# EAGLE board pcb (EAGLE 9.7.0)
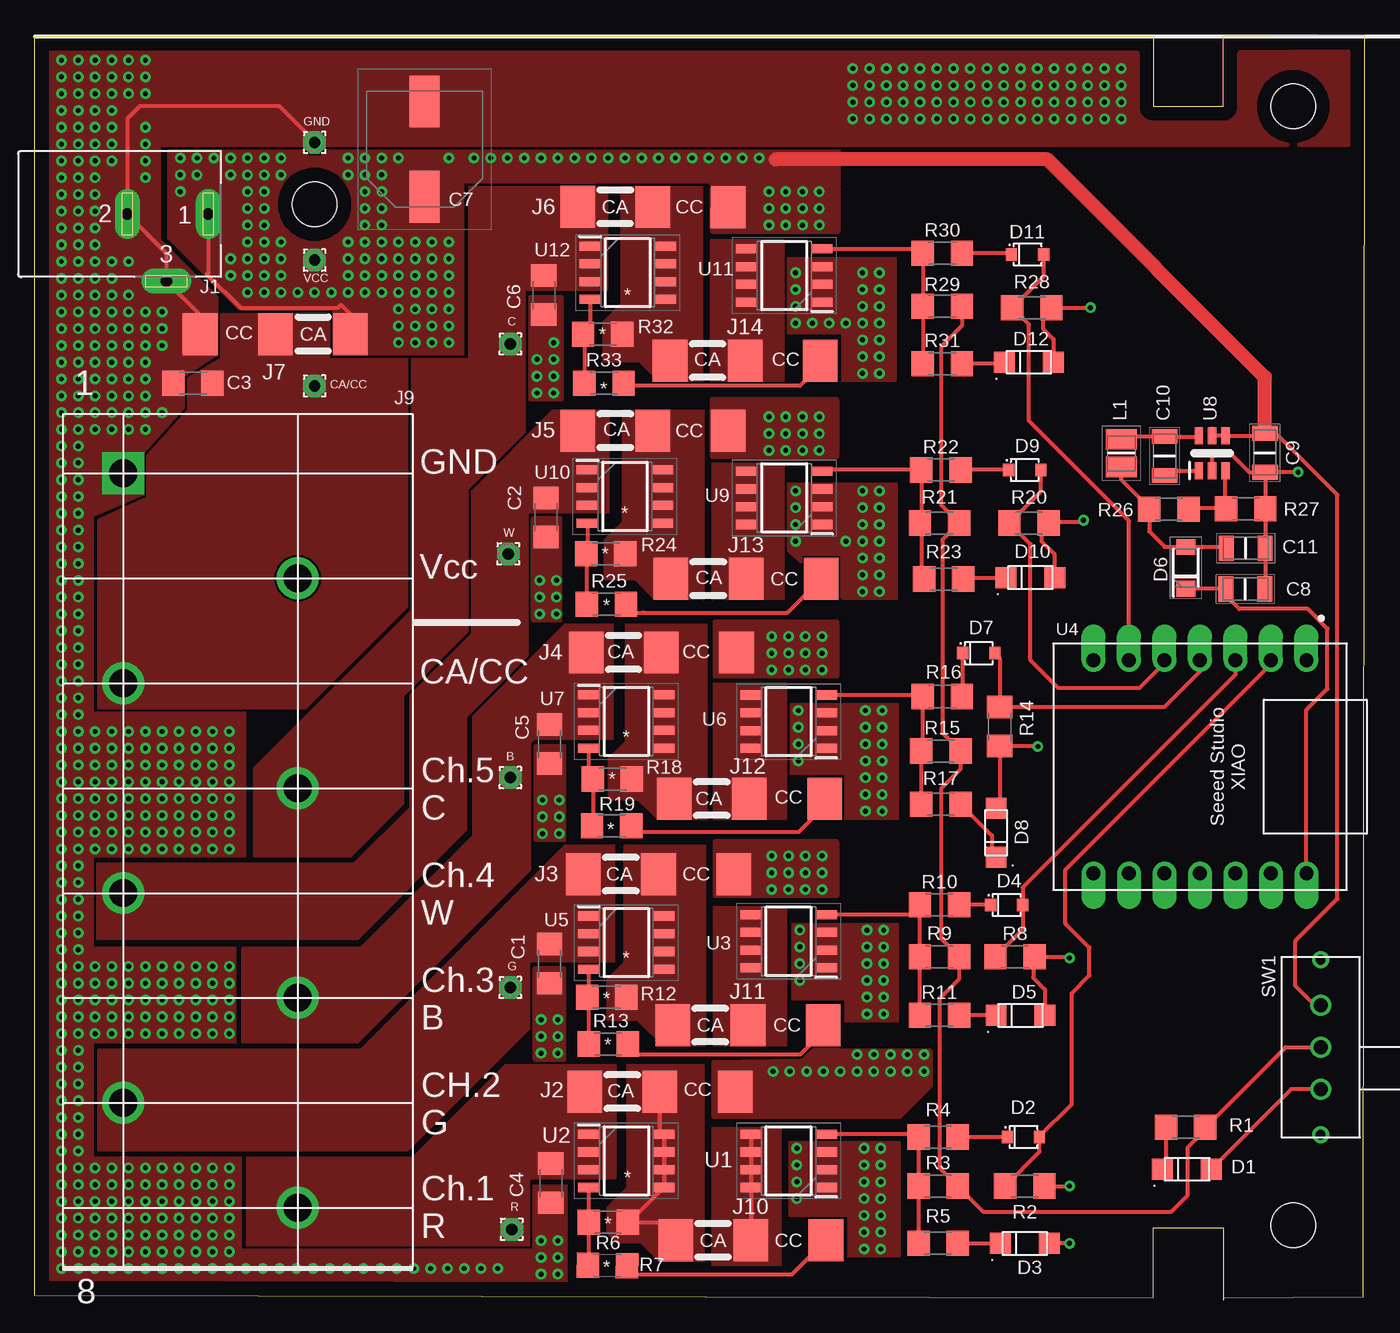
[diagram p0: board, top side]
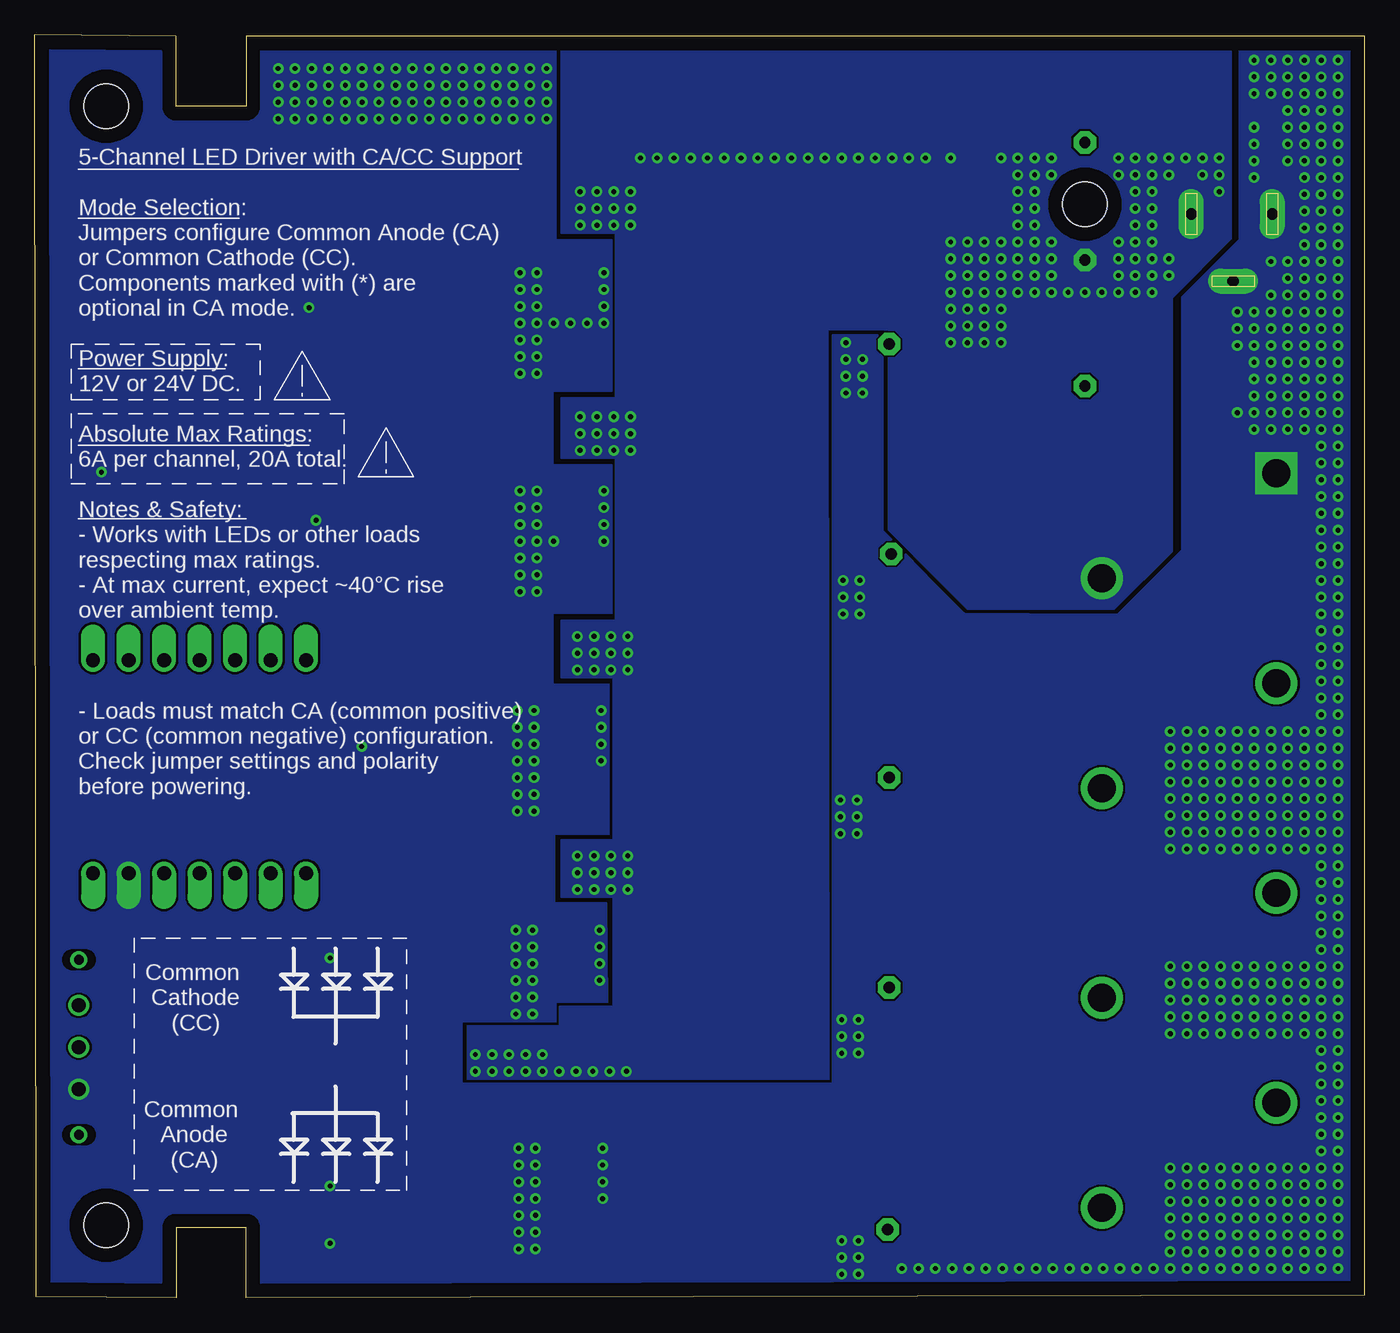
[diagram p1: board, bottom side, seen from below]

Size 95.1 x 90.3 mm. Coordinates in mm from the lower left corner, seen from the top.
Outline: 0,0.2 80,0 80,5 85,5 85,0 95,0.1 95.1,90.3 85,90.2 85,85.2 80,85.2 80,90.2 0,90.2 0,0.2
Copper layers (1*16): Top / Bottom
Stack-up 2 Layer Stack: Top SilkScreen Epoxy Ink / Top SolderMask User Defined 0.0254mm Dk 4.3 / Top Surface Finish Lead-Free 0.02mm / Top User Defined 0.22mm / Dielectric-1 Core:084 1.067mm / Bottom User Defined 0.22mm / Bottom Surface Finish Lead-Free 0.02mm / Bottom SolderMask User Defined 0.0254mm Dk 4.3 / Bottom SilkScreen Epoxy Ink
Design rules: minimum drill size 0.3mm, minimum copper width 4mil, keepout clearance 0mil, drill distance 6mil, via restrict clearance 0mil, dimension clearance 40mil, restrict clearance 0mil, copper clearance wire_polygon to wire_polygon 6mil, copper clearance wire_polygon to pad_smd 6mil, copper clearance wire_polygon to via 12mil, copper clearance pad_smd to pad_smd 1mm, copper clearance pad_smd to via 0.75mm, copper clearance via to via 12mil, copper clearance smd to pad (same net) 6mil, copper clearance smd to via (same net) 6mil, copper clearance smd to smd (same net) 6mil
Holes 3.2 mm at 90,5.2 90,85.2 20,78.2

## Footprints (pad centres in the part's own frame; a part is rotated, then mirrored left to right if it is on the bottom)
1206 = smd 1.6 x 1.8: 1 -1.4,0; 2 1.4,0
CAPAE830X1050N = smd 3.7 x 2.15: 1 -3.4,0; 2 3.4,0
CAPC3216X180N = smd 1.05 x 1.82: 1 -1.39,0; 2 1.39,0
1206-LED = smd 1.5 x 1.5: P$1 -1.75,0; P$2 1.75,0
USC_TOS = smd 0.8 x 0.9: 1 -1.15,0; 2 1.15,0
SODFL3518X115N = smd 1.12 x 1.37: 1 -1.5,0; 2 1.5,0
694106301002 = drill 0.8 pad 1.8 long: 1 13.6,0; 2 7.8,0; 3 10.6,-4.8
5102-2 = smd 2.475 x 3: P$1 0,0; P$2 5.375,0; P$3 -5.375,0
EB171SA-08-M = drill 2 square: P$1 4.25,4.3 | drill 2: P$2 11.75,16.8; P$3 19.25,4.3; P$4 26.75,16.8; P$5 34.25,4.3; P$6 41.75,16.8; P$7 49.25,4.3; P$8 56.75,16.8
INDC2520X100N = smd 1.45 x 2.2: 1 -1,0; 2 1,0
1,6/0,8 = drill 0.813 pad 1.6 octagon: 1 0,0
SLW-129956-4A-RA-N-D = drill 1: P$1 -3,0; P$2 0,0; P$3 3,0 | drill 0.7 slot 1.6 rotated 90: P$4 -6.25,0; P$5 6.25,0
SOIC127P600X175-8N = smd 1.5 x 0.65: 1 -2.7,1.905; 2 -2.7,0.635; 3 -2.7,-0.635; 4 -2.7,-1.905; 5 2.7,-1.905; 6 2.7,-0.635; 7 2.7,0.635; 8 2.7,1.905
SOIC127P600X170-8N = smd 1.525 x 0.65: 1 -2.688,1.905; 2 -2.688,0.635; 3 -2.688,-0.635; 4 -2.688,-1.905; 5 2.688,-1.905; 6 2.688,-0.635; 7 2.688,0.635; 8 2.688,1.905
XIAO-GENERIC-HYBRID-MODULE14P-2.54-21X17.8MM = drill 1 pad 1.7 offset: 1 -7.62,7.62; 2 -7.62,5.08; 3 -7.62,2.54; 4 -7.62,0; 5 -7.62,-2.54; 6 -7.62,-5.08; 7 -7.62,-7.62; 8 7.62,-7.62; 9 7.62,-5.08; 10 7.62,-2.54; 11 7.62,0; 12 7.62,2.54; 13 7.62,5.08; 14 7.62,7.62
SOT95P280X145-6N = smd 1.2 x 0.6: 1 -1.25,0.95; 2 -1.25,0; 3 -1.25,-0.95; 4 1.25,-0.95; 5 1.25,0; 6 1.25,0.95

## Placement (x,y rotation side)
C1  22uF  [1206]  36.8,23.9 90 top
C2  22uF  [1206]  36.55,55.8 90 top
C3  22uF  [1206]  11.3,65.4 0 top
C4  22uF  [1206]  36.9,8.2 90 top
C5  22uF  [1206]  36.8,39.6 90 top
C6  22uF  [1206]  36.4,71.7 90 top
C7  [CAPAE830X1050N]  27.86,82.13 90 top
C8  47uF  [CAPC3216X180N]  86.57,50.68 180 top
C9  2.2uF  [CAPC3216X180N]  87.97,60.43 90 top
C10  0.1uF  [CAPC3216X180N]  80.8,60.2 90 top
C11  22uF  [CAPC3216X180N]  86.6,53.6 180 top
D1  HT-150  [1206-LED]  82.4,9.2 0 top
D2  [USC_TOS]  70.7,11.5 0 top
D3  HT-150  [1206-LED]  70.8,3.9 0 top
D4  [USC_TOS]  69.5,28.1 0 top
D5  HT-150  [1206-LED]  70.5,20.2 0 top
D6  [SODFL3518X115N]  82.32,52.2 90 top
D7  [USC_TOS]  67.5,46.1 0 top
D8  HT-150  [1206-LED]  68.75,33.25 90 top
D9  [USC_TOS]  70.8,59.2 0 top
D10  HT-150  [1206-LED]  71.2,51.5 0 top
D11  [USC_TOS]  71,74.6 0 top
D12  HT-150  [1206-LED]  71.1,66.9 0 top
J1  694106301002  [694106301002]  -1.2,77.5 0 top
J2  [5102-2]  44.7,14.75 180 top
J3  [5102-2]  44.6,30.3 180 top
J4  [5102-2]  44.8,46.15 180 top
J5  [5102-2]  44.2,62 180 top
J6  [5102-2]  44.2,78 179.9 top
J7  [5102-2]  17.2,68.92 0 top
J9  EB171SA-08-M  [EB171SA-08-M]  2,63.2 270 top
J10  [5102-2]  51.2,4.12 180 top
J11  [5102-2]  51,19.5 180 top
J12  [5102-2]  51.1,35.7 180 top
J13  [5102-2]  50.86,51.42 180 top
J14  [5102-2]  50.8,67.02 180 top
L1  10uH  [INDC2520X100N]  77.7,60.4 270 top
PAD2  [1,6/0,8]  34.1,4.9 0 top
PAD3  [1,6/0,8]  34,22.2 0 top
PAD4  [1,6/0,8]  34,37.2 0 top
PAD5  [1,6/0,8]  33.85,53.2 0 top
PAD6  [1,6/0,8]  34,68.2 0 top
PAD7  [1,6/0,8]  20,65.2 0 top
PAD8  [1,6/0,8]  20,74.2 0 top
PAD9  [1,6/0,8]  20,82.62 0 top
R1  1K  [1206]  82.3,12.2 0 top
R2  10K  [1206]  70.8,8 0 top
R3  1K  [1206]  64.6,8 180 top
R4  75  [1206]  64.6,11.5 0 top
R5  300  [1206]  64.6,3.9 0 top
R6  10K  [1206]  41,5.4 0 top
R7  10K  [1206]  40.95,2.32 179 top
R8  10K  [1206]  70.1,24.4 0 top
R9  1K  [1206]  64.7,24.4 180 top
R10  75  [1206]  64.7,28.1 0 top
R11  300  [1206]  64.7,20.2 0 top
R12  10K  [1206]  40.9,21.5 0 top
R13  10K  [1206]  41,18.15 180 top
R14  10K  [1206]  69,40.85 270 top
R15  1K  [1206]  64.8,39.1 180 top
R16  75  [1206]  64.9,43 0 top
R17  300  [1206]  64.8,35.3 0 top
R18  10K  [1206]  41.3,37.1 0 top
R19  10K  [1206]  41.25,33.75 180 top
R20  10K  [1206]  71.1,55.4 0 top
R21  1K  [1206]  64.7,55.4 180 top
R22  75  [1206]  64.8,59.2 0 top
R23  300  [1206]  65,51.4 0 top
R24  10K  [1206]  40.83,53.2 0 top
R25  10K  [1206]  40.87,49.6 180 top
R26  88.7K  [1206]  81.1,56.39 180 top
R27  22.1K  [1206]  86.6,56.43 180 top
R28  10K  [1206]  71.3,70.8 0 top
R29  1K  [1206]  64.9,70.9 180 top
R30  75  [1206]  64.9,74.7 0 top
R31  300  [1206]  64.9,66.8 0 top
R32  10K  [1206]  40.6,68.9 0 top
R33  10K  [1206]  40.7,65.4 180 top
SW1  SLW-129956-4A-RA-N-D  [SLW-129956-4A-RA-N-D]  91.96,17.92 90 top
U1  N  [SOIC127P600X175-8N]  53.9,9.8 180 top
U2  P  [SOIC127P600X170-8N]  42.3,9.8 0 top
U3  N  [SOIC127P600X175-8N]  53.9,25.5 180 top
U4  XIAO-THRUHOLEHYBRID-SMT-THT  [XIAO-GENERIC-HYBRID-MODULE14P-2.54-21X17.8MM]  83.33,37.98 270 top
U5  P  [SOIC127P600X170-8N]  42.3,25.4 0 top
U6  N  [SOIC127P600X175-8N]  53.9,41.2 180 top
U7  P  [SOIC127P600X170-8N]  42.3,41.22 0 top
U8  [SOT95P280X145-6N]  84.2,60.4 90 top
U9  N  [SOIC127P600X175-8N]  53.6,57.2 180 top
U10  P  [SOIC127P600X170-8N]  42.2,57.3 0 top
U11  N  [SOIC127P600X175-8N]  53.6,73.1 180 top
U12  P  [SOIC127P600X170-8N]  42.4,73.3 0 top

## Library data of the parts
C1-C6 = SparkFun-Capacitors; PROD_ID: CAP-09822
C7 = project_lib; DESCRIPTION: RUBYCON - 35TRV100M8X10.5 - SMD Aluminium Electrolytic Capacitor, Radial Can, 100 F, 35 V, 0.15 ohm, TRV Series; HEIGHT: 10.5mm; MANUFACTURER_NAME: Rubycon; MANUFACTURER_PART_NUMBER: 35TRV100M8X10.5; MOUSER_PART_NUMBER: 232-35TRV100M8X10.5; MOUSER_PRICE-STOCK: https://www.mouser.co.uk/ProductDetail/Rubycon/35TRV100M8X105?qs=T3oQrply3y96cRA8S4HJ9A%3D%3D
C8-C11 = CL31A226KAHNNNE; DESCRIPTION: SAMSUNG ELECTRO-MECHANICS - CL31A226KAHNNNE - CAP, 22UF, 25V, MLCC, 1206; HEIGHT: 1.8mm; MANUFACTURER_NAME: SAMSUNG; MANUFACTURER_PART_NUMBER: CL31A226KAHNNNE; MOUSER_PART_NUMBER: 187-CL31A226KAHNNNE; MOUSER_PRICE-STOCK: https://www.mouser.co.uk/ProductDetail/Samsung-Electro-Mechanics/CL31A226KAHNNNE?qs=X6jEic%2FHinCdwsjGJII51w%3D%3D
D1 D3 D5 D8 D10 D12 J2-J7 J9-J14 SW1 = project_lib
D2 D4 D7 D9 D11 = project_lib; COPYRIGHT: Copyright (C) 2024 Ultra Librarian. All rights reserved.; MANUFACTURER_PART_NUMBER: CUS520,H3F; MFR_NAME: Toshiba Electronic Devices & Storage Corp.
D6 = 1N5819HW1-7-F; DESCRIPTION: 1N5819 Schottky Diode 40V 1A SOD123F; HEIGHT: 1.15mm; MANUFACTURER_NAME: Diodes Incorporated; MANUFACTURER_PART_NUMBER: 1N5819HW1-7-F; MOUSER_PART_NUMBER: 621-1N5819HW1-7-F; MOUSER_PRICE-STOCK: https://www.mouser.co.uk/ProductDetail/Diodes-Incorporated/1N5819HW1-7-F?qs=60RJRzIpcl9ACQG7Zn63jQ%3D%3D
J1 = DC Power Jacks; CREATED_BY: PCBLayout.com; DIGIKEY_PART_NUMBER: 732-5930-ND; MANUFACTURER: Wurth Electronics Inc.; MPN: 694106301002
L1 = AOTA-B252010S100MT; DESCRIPTION: IND 10uH 1.2A 420; HEIGHT: 1mm; MANUFACTURER_NAME: ABRACON; MANUFACTURER_PART_NUMBER: AOTA-B252010S100MT; MOUSER_PART_NUMBER: 815-AOTB252010S100MT; MOUSER_PRICE-STOCK: https://www.mouser.co.uk/ProductDetail/ABRACON/AOTA-B252010S100MT?qs=1Kr7Jg1SGW80mVrWNV0NfQ%3D%3D
PAD2-PAD9 = wirepad
R1-R33 = SparkFun-Resistors; PROD_ID: RES-08705
U1 U3 U6 U9 U11 = project_lib; DESCRIPTION: Diodes Inc DMG4496SSS-13 N-channel MOSFET Transistor, 10 A, 30 V, 8-Pin SOIC; HEIGHT: 1.75mm; MANUFACTURER_NAME: Diodes Incorporated; MANUFACTURER_PART_NUMBER: DMG4496SSS-13; MOUSER_PART_NUMBER: 621-DMG4496SSS-13; MOUSER_PRICE-STOCK: https://www.mouser.co.uk/ProductDetail/Diodes-Incorporated/DMG4496SSS-13?qs=TdAo5oSZJZPQGA%2FSpG2w%252BA%3D%3D
U2 U5 U7 U10 U12 = project_lib; DESCRIPTION: Trans MOSFET P-CH 30V 19.5A 8-Pin SO T/R; HEIGHT: 1.7mm; MANUFACTURER_NAME: Diodes Incorporated; MANUFACTURER_PART_NUMBER: DMP3036SSS-13; MOUSER_PART_NUMBER: 621-DMP3036SSS-13; MOUSER_PRICE-STOCK: https://www.mouser.co.uk/ProductDetail/Diodes-Incorporated/DMP3036SSS-13?qs=OVC8WVYZliRZKy3PQFLfog%3D%3D
U4 = Seeed Studio XIAO Series
U8 = project_lib; DESCRIPTION: Switching Voltage Regulators SIMPLE SWITCHER 36-V, 600-mA Buck Regulator With High-Efficiency Sleep Mode 6-SOT-23 -40 to 125; HEIGHT: 1.45mm; MANUFACTURER_NAME: Texas Instruments; MANUFACTURER_PART_NUMBER: TPS560430XFDBVR; MOUSER_PART_NUMBER: 595-TPS560430XFDBVR; MOUSER_PRICE-STOCK: https://www.mouser.co.uk/ProductDetail/Texas-Instruments/TPS560430XFDBVR?qs=y6ZabgHbY%252BykP8hTjJnvcA%3D%3D

## Nets
3V3: U4.12
5V: C11.2 D6.2 L1.2 R26.2
B_CC [6A]: J4.P$1 J12.P$2 R18.2 U7.5 U7.6 U7.7 U7.8
B_CTRL: D7.2 R14.1 U4.4
B_OUT [6A]: C5.2 J4.P$2 J9.P$6 PAD4.1 U7.1 U7.2 U7.3
C_CC [6A]: J6.P$1 J14.P$2 R32.2 U12.5 U12.6 U12.7 U12.8
C_CTRL: D11.2 R28.1 U4.6
C_OUT [6A]: C6.2 J6.P$2 J9.P$4 PAD6.1 U12.1 U12.2 U12.3
CA_CC [20A]: C3.2 J7.P$1 J9.P$3 PAD7.1
CTRL_: R1.2 R3.1 R9.1 R15.1 R21.1 R29.1 SW1.P$2
G_CC [6A]: J3.P$1 J11.P$2 R12.2 U5.5 U5.6 U5.7 U5.8
G_CTRL: D4.2 R8.1 U4.3
G_OUT [6A]: C1.2 J3.P$2 J9.P$7 PAD3.1 U5.1 U5.2 U5.3
GND [20A]: C1.1 C2.1 C3.1 C4.1 C5.1 C6.1 C7.2 C8.1 C9.1 C11.1 D1.P$2 D3.P$2 D5.P$2 D8.P$2 D10.P$2 D12.P$2 J1.2 J1.3 J7.P$3 J9.P$1 PAD9.1 R2.2 R8.2 R14.2 R20.2 R27.1 R28.2 SW1.P$1 U1.1 U1.2 U1.3 U3.1 U3.2 U3.3 U4.13 U6.1 U6.2 U6.3 U8.2 U9.1 U9.2 U9.3 U11.1 U11.2 U11.3
N$1: U4.10
N$2: C10.2 L1.1 U8.6
N$3 [6A]: J13.P$1 U9.5 U9.6 U9.7 U9.8
N$4: J13.P$3 R25.1
N$5: D1.P$1 R1.1
N$6: R24.1 R25.2 U10.4
N$7 [6A]: J12.P$1 U6.5 U6.6 U6.7 U6.8
N$8: J12.P$3 R19.1
N$9: R18.1 R19.2 U7.4
N$10: D3.P$1 R5.2
N$11 [6A]: J10.P$1 U1.5 U1.6 U1.7 U1.8
N$12: R6.1 R7.2 U2.4
N$13: J10.P$3 R7.1
N$14: D5.P$1 R11.2
N$15 [6A]: J11.P$1 U3.5 U3.6 U3.7 U3.8
N$16: R12.1 R13.2 U5.4
N$17: J11.P$3 R13.1
N$18: D8.P$1 R17.2
N$20: R9.2 R10.1 R11.1 U3.4
N$21: R15.2 R16.1 R17.1 U6.4
N$22: R21.2 R22.1 R23.1 U9.4
N$23: R3.2 R4.1 R5.1 U1.4
N$24 [6A]: J14.P$1 U11.5 U11.6 U11.7 U11.8
N$25: R32.1 R33.2 U12.4
N$26: R29.2 R30.1 R31.1 U11.4
N$27: D11.1 R30.2
N$28: J14.P$3 R33.1
N$29: C10.1 U8.1
N$30: R26.1 R27.2 U8.3
N$31: D9.1 R22.2
N$32: D10.P$1 R23.2
N$33: D2.1 R4.2
N$34: D12.P$1 R31.2
N$35: D4.1 R10.2
N$36: D7.1 R16.2
N$37: C8.2 D6.1 U4.14
R_CC [6A]: J2.P$1 J10.P$2 R6.2 U2.5 U2.6 U2.7 U2.8
R_CTRL: D2.2 R2.1 U4.2
R_OUT [6A]: C4.2 J2.P$2 J9.P$8 PAD2.1 U2.1 U2.2 U2.3
VCC [6A]: C7.1 C9.2 J1.1 J2.P$3 J3.P$3 J4.P$3 J5.P$3 J6.P$3 J7.P$2 J9.P$2 PAD8.1 SW1.P$3 U8.4 U8.5
W_CC [6A]: J5.P$1 J13.P$2 R24.2 U10.5 U10.6 U10.7 U10.8
W_CTRL: D9.2 R20.1 U4.5
W_OUT [6A]: C2.2 J5.P$2 J9.P$5 PAD5.1 U10.1 U10.2 U10.3

## Tracks (layer width: path | path; a pad name or v marks a point on that pad's centre or on a via)
5V
  Top 0.3: 79.7,56.5 77.7,58.5 L1.2 | R26.2 79.7,54.8 80.8,53.7 D6.2 85.11,53.7 C11.2 | 79.7,56.5 R26.2 | R26.2 79.7,56.5
B_CC
  pour Top (no thermals): 41,38.6 41,35.6 43.1,35.6 44.5,34.2 48.1,34.2 48.1,48.2 42.2,48.2 42.2,39.8
B_CTRL
  Top 0.3: U4.4 83.33,44.77 80.81,42.25 R14.1 69,45.75 D7.2
B_OUT
  pour Top (no thermals): 14.8,25.1 14.8,18.2 23.1,18.2 35.5,30.6 35.5,39.7 35.7,39.9 41.4,39.9 41.4,48.2 37.9,48.2 31.3,41.6 31.3,33.1 23.3,25.1
C_CC
  pour Top (no thermals): 40.6,69.8 40.6,67 40.7,66.9 43.2,66.9 44.6,65.5 47.8,65.5 47.8,79.5 41.9,79.5 41.9,71.1
C_CTRL
  Top 0.3: U4.6 78.25,55.55 71.6,62.2 71.1,62.7 71.1,68.4 71.1,69.6 R28.1 72.15,73.05 D11.2
C_OUT
  pour Top (no thermals): 15.6,36.4 15.6,31.5 22.6,31.5 26.4,35.3 26.4,43 31,47.6 31,57.8 35.1,61.9 35.1,72 41,72 41,79.5 31,79.5 31,67.2 26.9,67.2 26.9,49.2 15.6,37.9 15.6,36.3
CA_CC
  pour Top (isolate 0.1, no thermals): 4.5,55.7 4.5,42.1 19.4,42.1 26.7,49.4 26.7,67.2 21.1,67.2 21.1,70.4 13.3,70.4 13.3,67.24 10.9,65.8 10.9,63.5 8,60.3 8,57.3
CTRL_
  Top 0.3: R29.1 66.3,69.5 64.8,68 64.8,56.7 R21.1 64.9,54.2 64.9,40.4 R15.1 66.2,37.8 64.8,36.4 64.8,25.7 R9.1 66.1,22.8 64.7,21.4 64.7,9.3 R3.1 67.83,6.17 81.27,6.17 82.45,7.35 82.45,10.75 83.7,12.01 R1.2 83.74,12.2 89.46,17.92 SW1.P$2
G_CC
  pour Top (no thermals): 40.9,22.8 40.9,19.8 43.1,19.8 44.9,18 48,18 48,32.4 42.1,32.4 42.1,24
G_CTRL
  Top 0.3: R8.1 70.65,26.35 D4.2 70.65,29.35 85.87,44.57 U4.3
G_OUT
  pour Top (no thermals): 4.5,17.8 4.5,10.5 26.7,10.5 35.4,19.2 35.4,24 41.5,24 41.5,32.4 37.9,32.4 23.3,17.8
GND  (via drill 0.35)
  Top 0.3: SW1.P$1 89.86,14.92 84.15,9.21 D1.P$2 | C9.1 88,59.01 R27.1 C11.1 87.99,50.71 C8.1 | C9.1 86.86,59.04 85.5,60.4 84.5,60.4 84.2,60.1 U8.2 | v74,3.9 D3.P$2 | R2.2 v74,8 | 71.7,24.4 71.4,24.4 | 71.8,20.2 D5.P$2 72.25,22.05 71.4,22.9 71.4,24.4 | v74,24.3 73.9,24.4 71.4,24.4 | 72,55.5 72,54.1 72.9,53.2 72.9,51.55 D10.P$2 | 72.1,70.8 72.1,69.3 72.85,68.55 D12.P$2 | 72.1,70.8 v75.5,70.8 | v75,55.6 74.9,55.5 72,55.5 | C9.1 90.34,59.04 v90.35,59.05 | 72,55.5 72.5,55.5 72,55.5 | 72,55.5 72,55.4 R20.2 | 72.1,70.8 R28.2 72.1,70.8 | v71.73,39.43 71.71,39.45 R14.2 69,35.55 68.6,35.15 D8.P$2 | 71.4,24.4 R8.2 | 71.4,24.4 R8.2 | 71.4,24.4 R8.2 | J7.P$3 11.82,70.28 J1.3 9.4,74.7 J1.2 6.6,84.3 7.5,85.2 17.5,85.2 20,82.7 PAD9.1
  other vias: 36.2,1.7 37.4,1.7 36.2,2.9 37.4,2.9 36.2,4.1 37.4,4.1 36.2,17.5 37.4,17.5 36.2,18.7 37.4,18.7 36.2,19.9 37.4,19.9 36.3,33.2 37.5,33.2 36.3,34.4 37.5,34.4 36.3,35.6 37.5,35.6 36.1,48.9 37.3,48.9 36.1,50.1 37.3,50.1 36.1,51.3 37.3,51.3 37.1,68.3 37.1,67.1 35.9,67.1 37.1,65.9 35.9,65.9 37.1,64.7 35.9,64.7 7.9,88.5 6.7,88.5 5.5,88.5 4.3,88.5 3.1,88.5 1.9,88.5 7.9,87.3 6.7,87.3 5.5,87.3 4.3,87.3 3.1,87.3 1.9,87.3 7.9,86.1 6.7,86.1 5.5,86.1 4.3,86.1 3.1,86.1 1.9,86.1 5.5,84.9 4.3,84.9 3.1,84.9 1.9,84.9 7.9,83.7 5.5,83.7 4.3,83.7 3.1,83.7 1.9,83.7 7.9,82.5 5.5,82.5 4.3,82.5 3.1,82.5 1.9,82.5 7.9,81.3 5.5,81.3 4.3,81.3 3.1,81.3 1.9,81.3 7.9,80.1 4.3,80.1 3.1,80.1 1.9,80.1 4.3,78.9 3.1,78.9 9.1,3.3 7.9,3.3 6.7,3.3 5.5,3.3 4.3,3.3 3.1,3.3 1.9,3.3 33.1,2.1 31.9,2.1 30.7,2.1 29.5,2.1 28.3,2.1 27.1,2.1 25.9,2.1 24.7,2.1 23.5,2.1 22.3,2.1 21.1,2.1 19.9,2.1 18.7,2.1 17.5,2.1 16.3,2.1 15.1,2.1 13.9,2.1 12.7,2.1 11.5,2.1 10.3,2.1 9.1,2.1 7.9,2.1 6.7,2.1 5.5,2.1 4.3,2.1 3.1,2.1 1.9,2.1 10.3,3.3 11.5,3.3 12.7,3.3 13.9,3.3 1.9,4.5 3.1,4.5 4.3,4.5 5.5,4.5 6.7,4.5 7.9,4.5 9.1,4.5 10.3,4.5 11.5,4.5 12.7,4.5 13.9,4.5 1.9,5.7 3.1,5.7 4.3,5.7 5.5,5.7 6.7,5.7 7.9,5.7 9.1,5.7 10.3,5.7 11.5,5.7 12.7,5.7 13.9,5.7 1.9,6.9 3.1,6.9 4.3,6.9 5.5,6.9 6.7,6.9 7.9,6.9 9.1,6.9 10.3,6.9 11.5,6.9 12.7,6.9 13.9,6.9 1.9,8.1 3.1,8.1 4.3,8.1 5.5,8.1 6.7,8.1 7.9,8.1 9.1,8.1 10.3,8.1 11.5,8.1 12.7,8.1 13.9,8.1 1.9,9.3 3.1,9.3 4.3,9.3 5.5,9.3 6.7,9.3 7.9,9.3 9.1,9.3 10.3,9.3 11.5,9.3 12.7,9.3 13.9,9.3 1.9,10.5 3.1,10.5 1.9,11.7 3.1,11.7 1.9,12.9 3.1,12.9 1.9,14.1 3.1,14.1 1.9,15.3 3.1,15.3 1.9,16.5 3.1,16.5 1.9,17.7 3.1,17.7 1.9,18.9 3.1,18.9 4.3,18.9 5.5,18.9 6.7,18.9 7.9,18.9 9.1,18.9 10.3,18.9 11.5,18.9 12.7,18.9 13.9,18.9 1.9,20.1 3.1,20.1 4.3,20.1 5.5,20.1 6.7,20.1 7.9,20.1 9.1,20.1 10.3,20.1 11.5,20.1 12.7,20.1 13.9,20.1 1.9,21.3 3.1,21.3 4.3,21.3 5.5,21.3 6.7,21.3 7.9,21.3 9.1,21.3 10.3,21.3 11.5,21.3 12.7,21.3 13.9,21.3 1.9,22.5 3.1,22.5 4.3,22.5 5.5,22.5 6.7,22.5 7.9,22.5 9.1,22.5 10.3,22.5 11.5,22.5 12.7,22.5 13.9,22.5 1.9,23.7 3.1,23.7 4.3,23.7 5.5,23.7 6.7,23.7 7.9,23.7 9.1,23.7 10.3,23.7 11.5,23.7 12.7,23.7 13.9,23.7 1.9,24.9 3.1,24.9 1.9,26.1 3.1,26.1 1.9,27.3 3.1,27.3 1.9,28.5 3.1,28.5 1.9,29.7 3.1,29.7 1.9,30.9 3.1,30.9 1.9,32.1 3.1,32.1 4.3,32.1 5.5,32.1 6.7,32.1 7.9,32.1 9.1,32.1 10.3,32.1 11.5,32.1 12.7,32.1 13.9,32.1 1.9,33.3 3.1,33.3 4.3,33.3 5.5,33.3 6.7,33.3 7.9,33.3 9.1,33.3 10.3,33.3 11.5,33.3 12.7,33.3 13.9,33.3 1.9,34.5 3.1,34.5 4.3,34.5 5.5,34.5 6.7,34.5 7.9,34.5 9.1,34.5 10.3,34.5 11.5,34.5 12.7,34.5 13.9,34.5 1.9,35.7 3.1,35.7 4.3,35.7 5.5,35.7 6.7,35.7 7.9,35.7 9.1,35.7 10.3,35.7 11.5,35.7 12.7,35.7 13.9,35.7 1.9,36.9 3.1,36.9 4.3,36.9 5.5,36.9 6.7,36.9 7.9,36.9 9.1,36.9 10.3,36.9 11.5,36.9 12.7,36.9 13.9,36.9 1.9,38.1 3.1,38.1 4.3,38.1 5.5,38.1 6.7,38.1 7.9,38.1 9.1,38.1 10.3,38.1 11.5,38.1 12.7,38.1 13.9,38.1 1.9,39.3 3.1,39.3 4.3,39.3 5.5,39.3 6.7,39.3 7.9,39.3 9.1,39.3 10.3,39.3 11.5,39.3 12.7,39.3 13.9,39.3 1.9,40.5 3.1,40.5 4.3,40.5 5.5,40.5 6.7,40.5 7.9,40.5 9.1,40.5 10.3,40.5 11.5,40.5 12.7,40.5 13.9,40.5 1.9,41.7 3.1,41.7 1.9,42.9 3.1,42.9 1.9,44.1 3.1,44.1 1.9,45.3 3.1,45.3 1.9,46.5 3.1,46.5 1.9,47.7 3.1,47.7 1.9,48.9 3.1,48.9 1.9,50.1 3.1,50.1 1.9,51.3 3.1,51.3 1.9,52.5 3.1,52.5 1.9,53.7 3.1,53.7 1.9,54.9 3.1,54.9 1.9,56.1 3.1,56.1 1.9,57.3 3.1,57.3 1.9,58.5 3.1,58.5 1.9,59.7 3.1,59.7 1.9,60.9 3.1,60.9 1.9,62.1 3.1,62.1 4.3,62.1 5.5,62.1 6.7,62.1 7.9,62.1 1.9,63.3 3.1,63.3 4.3,63.3 5.5,63.3 6.7,63.3 7.9,63.3 9.1,63.3 1.9,64.5 3.1,64.5 4.3,64.5 5.5,64.5 6.7,64.5 7.9,64.5 1.9,65.7 3.1,65.7 4.3,65.7 5.5,65.7 6.7,65.7 7.9,65.7 1.9,66.9 3.1,66.9 4.3,66.9 5.5,66.9 6.7,66.9 7.9,66.9 1.9,68.1 3.1,68.1 4.3,68.1 5.5,68.1 6.7,68.1 7.9,68.1 9.1,68.1 1.9,69.3 3.1,69.3 4.3,69.3 5.5,69.3 6.7,69.3 7.9,69.3 9.1,69.3 1.9,70.5 3.1,70.5 4.3,70.5 5.5,70.5 6.7,70.5 7.9,70.5 9.1,70.5 1.9,71.7 3.1,71.7 4.3,71.7 5.5,71.7 6.7,71.7 1.9,72.9 3.1,72.9 4.3,72.9 5.5,72.9 1.9,74.1 3.1,74.1 4.3,74.1 5.5,74.1 6.7,74.1 1.9,75.3 3.1,75.3 4.3,75.3 1.9,76.5 3.1,76.5 4.3,76.5 1.9,77.7 3.1,77.7 4.3,77.7 1.9,78.9 60.4,73.3 59.2,73.3 54.4,73.3 60.4,72.1 59.2,72.1 54.4,72.1 60.4,70.9 59.2,70.9 54.4,70.9 60.4,69.7 59.2,69.7 58,69.7 56.8,69.7 59.2,66.1 60.4,66.1 59.2,67.3 60.4,67.3 59.2,68.5 60.4,68.5 54.4,69.7 55.6,69.7 60.4,57.7 59.2,57.7 54.4,57.7 60.4,56.5 59.2,56.5 54.4,56.5 60.4,55.3 59.2,55.3 54.4,55.3 60.4,54.1 59.2,54.1 58,54.1 59.2,50.5 60.4,50.5 59.2,51.7 60.4,51.7 59.2,52.9 60.4,52.9 54.4,54.1 60.6,42 59.4,42 54.6,42 60.6,40.8 59.4,40.8 54.6,40.8 60.6,39.6 59.4,39.6 54.6,39.6 60.6,38.4 59.4,38.4 59.4,34.8 60.6,34.8 59.4,36 60.6,36 59.4,37.2 60.6,37.2 54.6,38.4 60.71,26.3 59.51,26.3 54.71,26.3 60.71,25.1 59.51,25.1 54.71,25.1 60.71,23.9 59.51,23.9 54.71,23.9 60.71,22.7 59.51,22.7 59.51,20.3 60.71,20.3 59.51,21.5 60.71,21.5 54.71,22.7 60.5,10.7 59.3,10.7 54.5,10.7 60.5,9.5 59.3,9.5 54.5,9.5 60.5,8.3 59.3,8.3 54.5,8.3 60.5,7.1 59.3,7.1 59.3,3.5 60.5,3.5 59.3,4.7 60.5,4.7 59.3,5.9 60.5,5.9 54.5,7.1 77.7,87.9 76.5,87.9 75.3,87.9 74.1,87.9 66.9,84.3 65.7,84.3 64.5,84.3 63.3,84.3 62.1,84.3 60.9,84.3 59.7,84.3 58.5,84.3 68.1,84.3 69.3,84.3 70.5,84.3 71.7,84.3 72.9,84.3 74.1,84.3 75.3,84.3 76.5,84.3 77.7,84.3 58.5,85.5 59.7,85.5 60.9,85.5 62.1,85.5 63.3,85.5 64.5,85.5 65.7,85.5 66.9,85.5 68.1,85.5 69.3,85.5 70.5,85.5 71.7,85.5 72.9,85.5 74.1,85.5 75.3,85.5 76.5,85.5 77.7,85.5 58.5,86.7 59.7,86.7 60.9,86.7 62.1,86.7 63.3,86.7 64.5,86.7 65.7,86.7 66.9,86.7 68.1,86.7 69.3,86.7 70.5,86.7 71.7,86.7 72.9,86.7 74.1,86.7 75.3,86.7 76.5,86.7 77.7,86.7 58.5,87.9 59.7,87.9 60.9,87.9 62.1,87.9 63.3,87.9 64.5,87.9 65.7,87.9 66.9,87.9 68.1,87.9 69.3,87.9 70.5,87.9 71.7,87.9 72.9,87.9
  pour Top (isolate 0.1, no thermals): 0.1,90.2 9,90.2 9,75.7 13.1,71.6 13.1,67.4 10.7,65.86 10.7,63.6 7.8,60.4 7.8,57.4 4.2,55.87 4.2,41.9 15.1,41.9 15.1,31.5 4.2,31.5 4.2,25.1 14.4,25.1 14.4,18.2 4.2,18.2 4.2,10.1 14.8,10.1 14.8,3.5 35.6,3.5 35.6,8.1 38.1,8.1 38.1,0.2 0,0.2 0.1,55.2
  pour Bottom (isolate 0.1, no thermals): 0.1,90.2 0.1,0.2 38.1,0.2 38.1,68.9 34.4,68.9 34.4,54.88 30.8,51.17 28.6,48.97 19.39,48.9 17.7,48.9 13.1,53.5 13.1,71.6 9,75.7 9.01,90.2
  pour Top (isolate 0.1, no thermals): 35.6,23.7 38,23.7 38,16.9 35.6,16.9
  pour Top (isolate 0.1, no thermals): 35.7,39.6 38,39.6 38,32.6 35.7,32.6
  pour Top (isolate 0.1, no thermals): 35.5,55.9 37.7,55.9 37.7,48.3 35.5,48.3
  pour Top (isolate 0.1, no thermals): 35.3,71.7 37.8,71.7 37.8,64.1 35.3,64.1
  pour Top (isolate 0.1, no thermals): 6.9,90.2 100,90.2 100,82.3 6.9,82.3
  pour Bottom (isolate 0.1, no thermals): 57.8,90.2 57.8,75.7 53.8,75.7 53.8,64.8 58,64.8 58,59.6 53.8,59.6 53.8,48.9 58,48.9 58,43.9 54,43.9 54,33.1 57.9,33.1 57.9,28.3 54.2,28.3 54.1,21.1 57.8,21.1 57.8,19.7 64.5,19.7 64.5,15.4 38.1,15.4 38.1,0 100.1,0 100.1,90.2
  pour Top (isolate 0.1, no thermals): 53.8,74.4 53.8,68.9 57.7,68.9 57.7,65.5 61.6,65.5 61.6,74.4
  pour Top (isolate 0.1, no thermals): 53.8,58.3 53.8,53.37 57.8,49.9 61.7,49.9 61.7,58.3
  pour Top (isolate 0.1, no thermals): 54,42.5 54,37.4 57.9,37.4 57.9,34.2 61.8,34.2 61.8,42.5
  pour Top (isolate 0.1, no thermals): 54.1,26.8 54.1,21.3 57.9,21.3 57.9,19.7 61.8,19.7 61.8,26.8
  pour Top (isolate 0.1, no thermals): 53.9,11.2 53.9,5.8 58.1,5.8 58.1,2.9 61.9,2.9 61.9,11.2
N$2
  Top 0.3: U8.6 83.19,61.59 C10.2 77.89,61.59 L1.1
N$3
  pour Top (no thermals): 48.4,49.9 53.6,49.9 53.6,59.7 48.4,59.7
N$4
  Top 0.3: J13.P$3 53.82,49 43.5,49 42.87,49 R25.1
N$5
  Top 0.3: R1.1 80.9,9.45 D1.P$1
N$6
  Top 0.3: U10.4 39.51,53.29 R24.1 39.47,53.15 R25.2
N$7
  pour Top (no thermals): 48.5,34.2 53.8,34.2 53.8,44 48.5,44
N$8
  Top 0.3: R19.1 42.65,33.35 42.7,33.3 54.6,33.3 56.48,35.18 J12.P$3
N$9
  Top 0.3: U7.4 39.61,37.39 R18.1 39.9,33.8 R19.2
N$10
  Top 0.3: R5.2 D3.P$1
N$11
  Top 0.3: U1.5 U1.6 U1.7 U1.8 J10.P$1
  pour Top (no thermals): 48.4,12.2 53.4,12.2 53.4,2.3 48.4,2.3
N$12
  Top 0.3: U2.4 39.61,5.41 R6.1 39.6,2.39 R7.2
N$13
  Top 0.3: J10.P$3 54.12,1.67 42.97,1.67 R7.1
N$14
  Top 0.3: D5.P$1 R11.2
N$15
  pour Top (no thermals): 48.5,18 53.8,18 53.8,28 48.5,28
N$16
  Top 0.3: U5.4 39.61,21.61 R12.1 39.6,21.4 R13.2
N$17
  Top 0.3: R13.1 43.15,17.4 54.7,17.4 56.38,19.07 J11.P$3
N$18
  Top 0.3: D8.P$1 68.45,31.5 68.45,33.05 R17.2
N$20
  Top 0.3: R11.1 R9.2 R10.1 62.6,27.4 U3.4
N$21
  Top 0.3: 63.5,43.1 U6.4 | R17.1 R15.2 63.5,39.2 63.5,42.1 63.5,43.1 | 63.5,43.1 R16.1
N$22
  Top 0.3: U9.4 56.4,59.2 R22.1 63.4,55.5 R21.2 63.4,55.3 63.4,51.6 R23.1
N$23
  Top 0.3: U1.4 63,11.7 R4.1 63.2,8.2 | 63.2,8.2 R3.2 | 63.2,8.2 R5.1
N$24
  pour Top (no thermals): 48.3,65.5 53.6,65.5 53.6,75.7 48.3,75.7
N$25
  Top 0.3: U12.4 39.71,69.41 R32.1 39.3,68.8 R33.2
N$26
  Top 0.3: U11.4 63.2,75.01 R30.1 R29.2 R31.1
N$27
  Top 0.3: R30.2 69.75,74.7 D11.1
N$28
  Top 0.3: J14.P$3 56.17,66.67 54.72,65.22 42.28,65.22 R33.1
N$29
  Top 0.3: U8.1 81.14,59.15 C10.1
N$30
  Top 0.3: 85.07,56.8 85.57,56.8 R27.2 | U8.3 85.15,56.88 85.07,56.8 | 85.07,56.8 84.77,56.5 82.61,56.5 R26.1
N$31
  Top 0.3: D9.1 R22.2
N$32
  Top 0.3: D10.P$1 66.4,51.5 R23.2
N$33
  Top 0.3: D2.1 R4.2
N$34
  Top 0.3: D12.P$1 69.25,66.8 R31.2
N$35
  Top 0.3: D4.1 R10.2
N$36
  Top 0.3: D7.1 66.35,43.05 R16.2
N$37
  Top 0.3: C8.2 85.16,50.7 D6.1 | 85.18,50.29 C8.2 | U4.14 90.95,42.04 92.45,43.55 92.45,47.86 91.05,49.27 86.14,49.27 85.18,50.22 C8.2
R_CC
  Top 0.3: J10.P$2 44.54,5.4 R6.2 42.49,5.4 U2.5 U2.6 U2.7 U2.8 44.7,11.99 J2.P$1
  pour Top (no thermals): 40.9,6.5 40.9,4.6 41.6,3.9 43.3,3.9 44.6,2.6 47.9,2.6 47.9,16.7 42.3,16.7 42.3,7.9
R_CTRL
  Top 0.3: R2.1 71.85,10.45 D2.2 71.85,11.55 74.15,13.85 74.15,21.77 75.43,23.05 75.43,25.04 73.71,26.77 73.71,30.62 88.41,45.32 U4.2
R_OUT
  pour Top (no thermals): 15.1,10.1 15.1,3.7 35.4,3.7 35.4,8.5 41.6,8.5 41.6,16.7 33.6,16.7 27,10.1
VCC  (via drill 0.35)
  Top 0.3: 84.2,62.16 U8.5 U8.4 87.8,61.65 C9.2 88.75,61.82 93.15,57.42 93.15,28.54 90.15,25.54 90.15,22.32 91.55,20.92 SW1.P$3 | J1.1 12.4,73.3 12.3,73.2 14.7,70.8 21.7,70.8 21.9,71 22.57,70.33 J7.P$2
  Top 1: C9.2 87.97,65.83 72.4,81.4 52.98,81.4
  other vias: 56.1,79.1 54.9,79.1 53.7,79.1 52.5,79.1 56.1,77.9 54.9,77.9 53.7,77.9 52.5,77.9 52.5,76.7 53.7,76.7 54.9,76.7 56.1,76.7 63.6,17.4 62.4,17.4 61.2,17.4 60,17.4 58.8,17.4 63.6,16.2 62.4,16.2 61.2,16.2 52.8,16.2 54,16.2 55.2,16.2 56.4,16.2 57.6,16.2 58.8,16.2 60,16.2 56.3,31.6 55.1,31.6 53.9,31.6 52.7,31.6 56.3,30.4 55.1,30.4 53.9,30.4 52.7,30.4 52.7,29.2 53.9,29.2 55.1,29.2 56.3,29.2 56.3,47.3 55.1,47.3 53.9,47.3 52.7,47.3 56.3,46.1 55.1,46.1 53.9,46.1 52.7,46.1 52.7,44.9 53.9,44.9 55.1,44.9 56.3,44.9 56.1,63 54.9,63 53.7,63 52.5,63 56.1,61.8 54.9,61.8 53.7,61.8 52.5,61.8 52.5,60.6 53.7,60.6 54.9,60.6 56.1,60.6 29.6,81.5 26,81.5 24.8,81.5 23.6,81.5 22.4,81.5 17.6,81.5 16.4,81.5 15.2,81.5 14,81.5 12.8,81.5 11.6,81.5 10.4,81.5 24.8,80.3 23.6,80.3 22.4,80.3 17.6,80.3 16.4,80.3 15.2,80.3 14,80.3 11.6,80.3 10.4,80.3 24.8,79.1 23.6,79.1 16.4,79.1 15.2,79.1 10.4,79.1 24.8,77.9 23.6,77.9 16.4,77.9 15.2,77.9 24.8,76.7 23.6,76.7 16.4,76.7 15.2,76.7 29.6,75.5 28.4,75.5 27.2,75.5 26,75.5 24.8,75.5 23.6,75.5 29.6,69.5 28.4,69.5 27.2,69.5 26,69.5 29.6,68.3 28.4,68.3 27.2,68.3 26,68.3 26,70.7 27.2,70.7 28.4,70.7 29.6,70.7 15.2,71.9 16.4,71.9 17.6,71.9 18.8,71.9 20,71.9 21.2,71.9 22.4,71.9 23.6,71.9 24.8,71.9 26,71.9 27.2,71.9 28.4,71.9 29.6,71.9 14,73.1 15.2,73.1 16.4,73.1 17.6,73.1 22.4,73.1 23.6,73.1 24.8,73.1 26,73.1 27.2,73.1 28.4,73.1 29.6,73.1 14,74.3 15.2,74.3 16.4,74.3 17.6,74.3 22.4,74.3 23.6,74.3 24.8,74.3 26,74.3 27.2,74.3 28.4,74.3 29.6,74.3 15.2,75.5 16.4,75.5 17.6,75.5 22.4,75.5 51.8,81.5 50.6,81.5 49.4,81.5 48.2,81.5 47,81.5 45.8,81.5 44.6,81.5 43.4,81.5 42.2,81.5 41,81.5 31.4,81.5 32.6,81.5 33.8,81.5 35,81.5 36.2,81.5 37.4,81.5 38.6,81.5 39.8,81.5
  pour Top (no thermals): 9.5,82.1 57.6,82.1 57.6,79.5 48.3,79.5 48.3,79.7 30.7,79.7 30.7,67.4 21.3,67.4 21.3,70.6 14.6,70.6 9.5,75.7
  pour Bottom (isolate 0.1, no thermals): 9.5,90.2 34.1,90.2 34.1,54.9 28.4,49.2 17.9,49.2 13.72,53.38 13.72,71.48 9.5,75.7
  pour Bottom (isolate 0.1, no thermals): 57.5,90.2 57.5,76.1 53.6,76.1 53.6,64.4 57.5,64.4 57.5,60 53.6,60 53.6,48.5 57.5,48.5 57.5,44.3 53.8,44.3 53.8,32.8 57.5,32.8 57.5,28.6 53.8,28.6 53.8,20.9 57.6,20.9 57.6,19.5 64.2,19.5 64.2,15.6 38.27,15.6 38.36,69.2 33.8,69.2 33.8,90.2
  pour Top (isolate 0.1, no thermals): 48.3,79.5 57.6,79.5 57.6,76.1 48.3,76.1
  pour Top (isolate 0.1, no thermals): 48.3,64.4 57.5,64.4 57.5,60 48.3,60
  pour Top (isolate 0.1, no thermals): 48.5,48.5 57.5,48.5 57.5,44.3 48.5,44.3
  pour Top (isolate 0.1, no thermals): 48.5,32.8 57.5,32.8 57.5,28.6 48.5,28.6
  pour Top (isolate 0.1, no thermals): 48.4,17 54.9,17.1 55.6,17.8 64.2,17.8 64.2,15.1 61.9,12.8 48.4,12.8
W_CC
  pour Top (no thermals): 40.7,54.2 40.7,51.4 40.8,51.3 42.9,51.3 44.3,49.9 47.9,49.9 47.9,63.5 42,63.5 42,55.5
W_CTRL
  Top 0.3: D9.2 71.95,57.65 R20.1 71.2,53.9 71.2,52.3 71.2,45.6 73.2,43.6 79,43.6 80.79,45.39 U4.5
W_OUT
  pour Top (no thermals): 4.4,31.1 4.4,25.6 23.1,25.6 30.9,33.4 30.9,41.5 35.3,45.9 35.3,56.1 41.1,56.1 41.1,63.5 37,63.5 31.2,57.7 31.2,47.5 26.8,43.1 26.8,35.1 22.8,31.1

## Text on the board
SilkscreenTop: GND | CA | CC | VCC | * | CC | CA | C | * | CA | CC | CA/CC | * | CA | CC | GND | * | W | * | Vcc | CA | CC | * | CA | CC | CA/CC | * | B | * | Ch.5 / C | CA | CC | * | CA | CC | Ch.4 / W | * | G | Ch.3 / B | * | CA | CC | * | CA | CC | CH.2 / G | * | Ch.1 / R | R | * | CA | CC | *
SilkscreenBottom: 5-Channel LED Driver with CA/CC Support / / Mode Selection: / Jumpers configure Common Anode (CA) / or Common Cathode (CC). / Components marked with (*) are / optional in CA mode. / / Power Supply: / 12V or 24V DC. / / Absolute Max Ratings: / 6A per channel, 20A total. / / Notes & Safety: / - Works with LEDs or other loads / respecting max ratings. / - At max current, expect ~40°C rise / over ambient temp. / / / / - Loads must match CA (common positive) / or CC (common negative) configuration. / Check jumper settings and polarity / before powering. | Common / Cathode / (CC) | Common / Anode / (CA)